# Altium PCB GPS_Rev2.2.PcbDoc
Units mil, origin at the board's own origin, x right, y up, seen from the top; angles counter-clockwise.
Board outline 1915 x 1130 mil, 2 copper layers (Top Layer, Bottom Layer); 43 components, 35 nets, 189 pads, 34 vias.
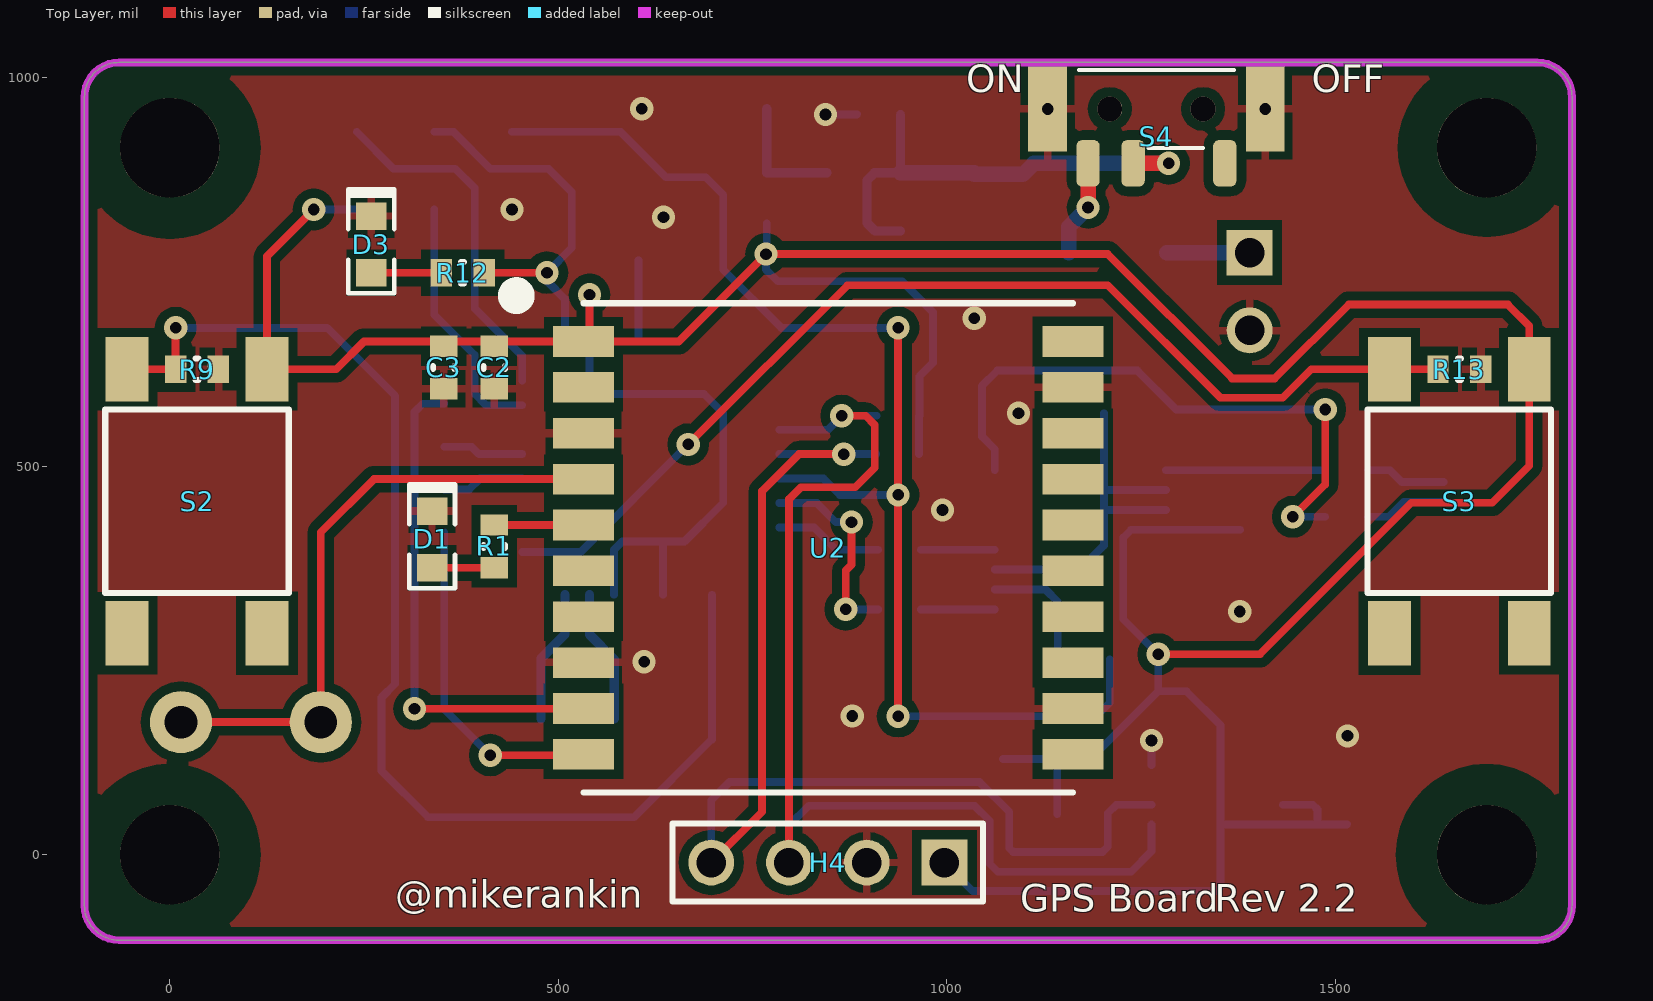
[diagram p0: Top Layer view]
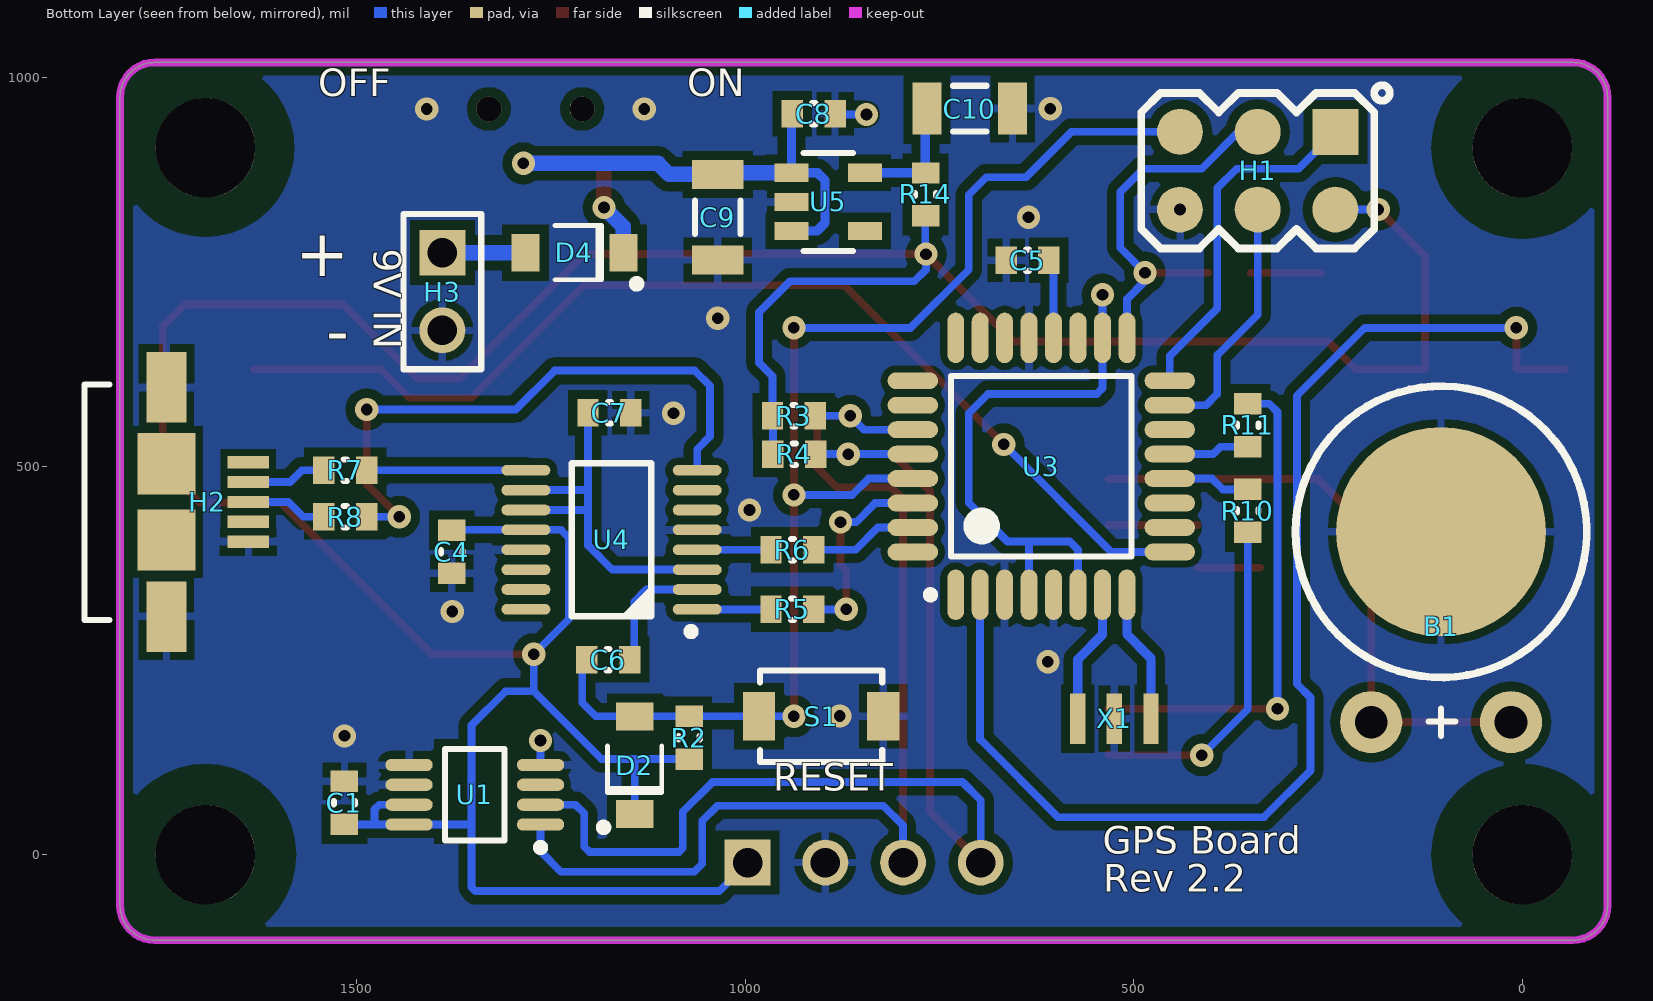
[diagram p1: Bottom Layer view, seen from below]
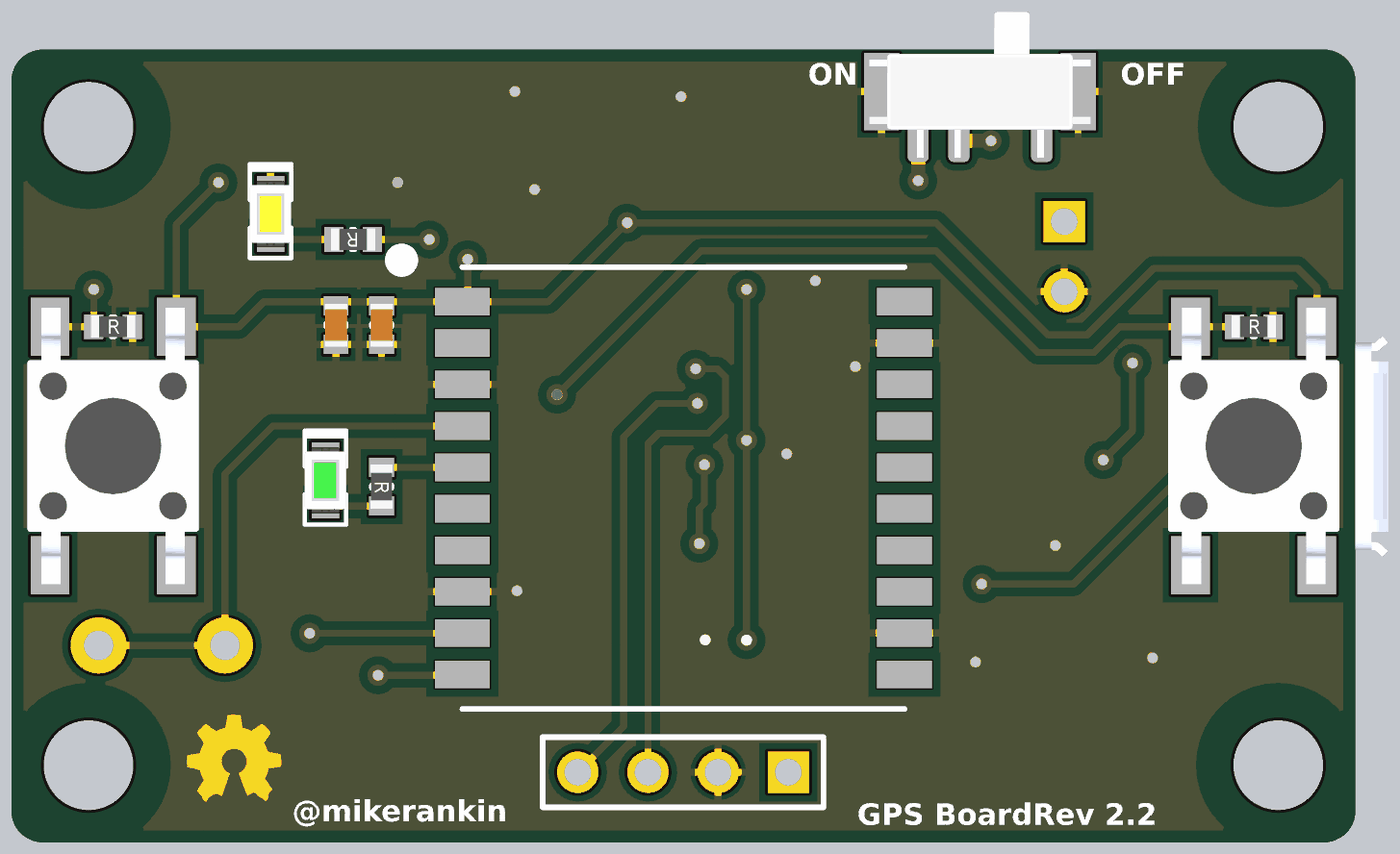
[diagram p2: 3D render of the assembled board from above, using the file's embedded part models]
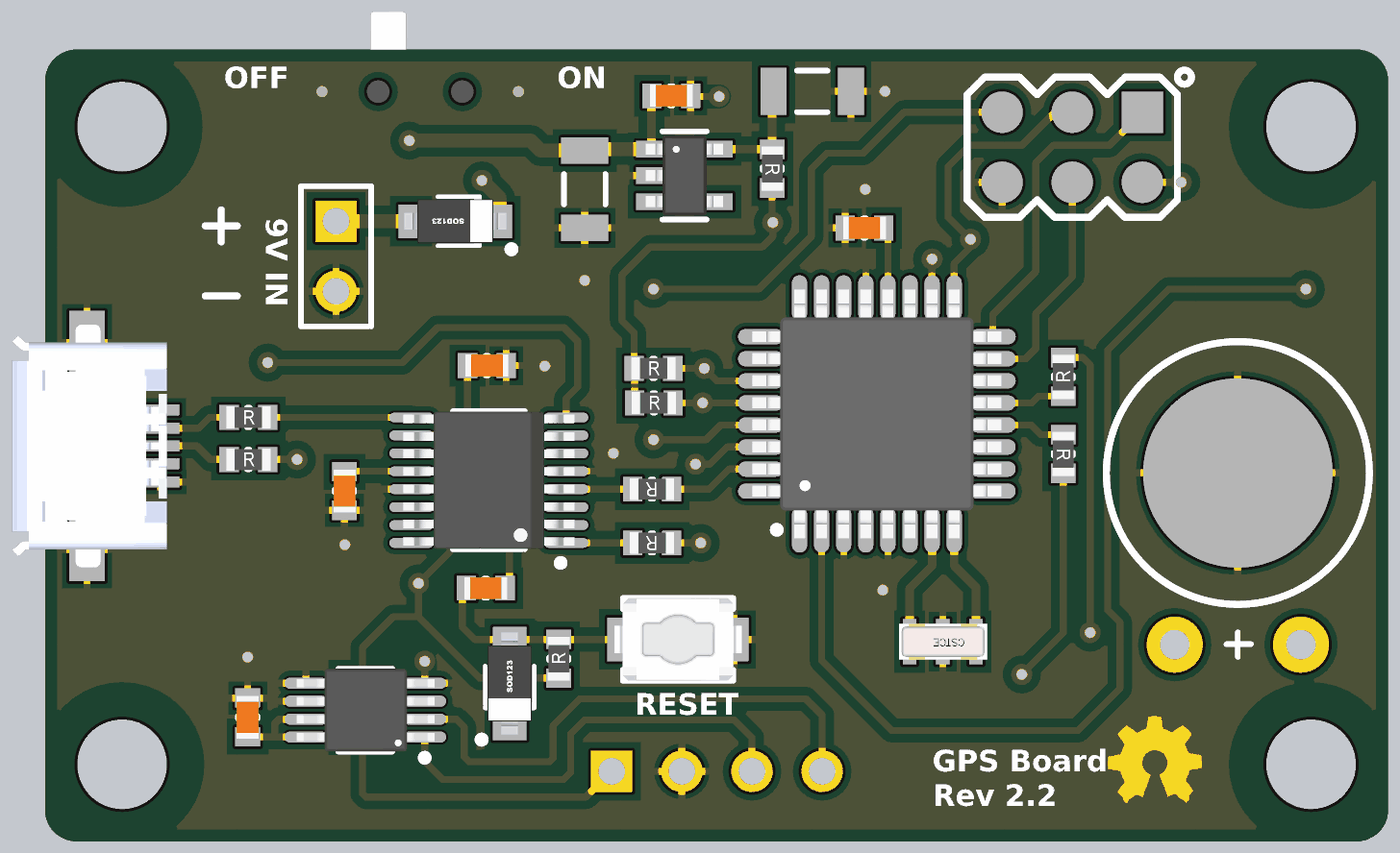
[diagram p3: 3D render of the assembled board from below, using the file's embedded part models]

## Layer stack, top to bottom
Top Solder: solder mask 0.4, Solder Resist, Dk 3.5
Top Layer: signal copper 1.4
Dielectric1: core 12.6, FR-4, Dk 4.8
Bottom Layer: signal copper 1.4
Bottom Solder: solder mask 0.4, Solder Resist, Dk 3.5

## Board outline
-110,-65 ccw(c-65,-65) -65,-110 1760,-110 ccw(c1760,-65) 1805,-65 1805,975 ccw(c1760,975) 1760,1020 -65,1020 ccw(c-65,975) -110,975

## Design rules (kind name [scope] priority, off if disabled: settings)
Clearance Clearance_USB [HasFootprint('1981584-1')] p1: gap=9.5
Clearance Clearance_SOP16 [HasFootprint('SOP65P602X173-16N')] p2: gap=9
Clearance TQFP [HasFootprint('TQFP80P700X700-32N')] p3: gap=9
Clearance MSOP [(HasFootprint('MSOP-8N - NOPAD'))] p4: gap=9
Clearance TSSOP_Footprint [HasFootprint('TSSOP50P490X110-10N')] p5: gap=7.5
Clearance [All] p6: gap=12
HoleSize [All] p1: absolutevalues=TRUE maxlimit=150 minlimit=1 maxpercent=80.000 minpercent=20.000
MinimumSolderMaskSliver MinimumSolderMaskSliver_1 [InComponent('U2')] p1: minsoldermaskwidth=1
MinimumSolderMaskSliver MinimumSolderMaskSliver_J1 [InComponent('J1')] p2: minsoldermaskwidth=3
MinimumSolderMaskSliver MinimumSolderMaskSliver_U6 [InComponent('U6')] p3: minsoldermaskwidth=2
MinimumSolderMaskSliver MinimumSolderMaskSliver_U1 [InComponent('U1')] p4: minsoldermaskwidth=2
MinimumSolderMaskSliver [All] p5: minsoldermaskwidth=5
PlaneConnect Via_No_Relief [(IsVia)] p1: planeconnectstyle=Direct reliefexpansion=20 reliefentries=4 reliefconductorwidth=10 reliefairgap=10
PlaneConnect [All] p2: planeconnectstyle=Relief reliefexpansion=20 reliefentries=4 reliefconductorwidth=30 reliefairgap=10
PolygonConnect No_Relief [(IsVia)] p1: connectstyle=Direct reliefconductorwidth=10 reliefentries=4 polygonreliefangle="90 Angle" airgapwidth=10
PolygonConnect [All] p2: connectstyle=Relief reliefconductorwidth=10 reliefentries=4 polygonreliefangle="90 Angle" airgapwidth=10
RoutingVias [All] p1: holewidth=0 width=30 viastyle="Through Hole" minholewidth=15 minwidth=30 maxholewidth=15 maxwidth=30
SilkToSilkClearance [All] p1: silktosilkclearance=4
SilkToSolderMaskClearance SilkscreenOverComponentPads [IsPad] p1: minsilkscreentomaskgap=2 clearancetoexposedcopper=TRUE
SolderMaskExpansion [All] p1: expansion=4
Width [All] p1: maxlimit=25 minlimit=10 preferedwidth=10
25 further rules are at their usual default settings.

## Components (designator, comment, footprint, x,y, rotation, side; value= is the part's Value field where it differs from the comment)
B1 "CR927" "CR927 Mount" 104.35,415.75 r90 bottom
C1 "0.1uF" CAPC1608X09L 1516,67 r90 bottom
C2 "0.01uF" CAPC1608X09L 417.54,627.28 r270 top
C3 "0.1uF" CAPC1608X09L 352.54,627.28 r270 top
C4 "2.2uF" CAPC1608X09L 1378,390 r270 bottom
C5 "0.1uF" CAPC1608X09L 636.72,765.35 r180 bottom
C6 "0.1uF" CAPC1608X09L 1176.57,251.34 r0 bottom
C7 "0.1uF" CAPC1608X09L 1175,569 r180 bottom
C8 "0.1uF" CAPC1608X09L 912,954 r180 bottom
C9 "CAP_1206" CAPC3216X160L 1035.5,820.67 r270 bottom
C10 "CAP_1206" CAPC3216X160L 711.17,960.35 r180 bottom
D1 "Green LED" LED1608X55N-GREEN 337.54,405.94 r270 top
D2 "1N4148" SOD123 1142.44,115.23 r90 bottom
D3 "LED_0603" LED1608X55N-YELLOW 259.35,785.75 r270 top
D4 "1N4148" SOD123 1220,775 r0 bottom
H1 "DNP" HDR3X2 340.47,880.59 r0 bottom
H2 "Micro USB" 1981584-1 1692.34,454.21 r270 bottom
H3 "TSW-102-07-L-S" HDR1X2 1390,725 r270 bottom
H4 "TSW-104-07-L-S" HDR1X4-Empty 847,-10 r180 top
R1 "470R" RESC1608X06L 417.54,396.97 r270 top
R2 "10K" RESC1608X06L 1072.44,150.67 r90 bottom
R3 "4.7K" RESC1608X06L 937.44,565 r180 bottom
R4 "4.7K" RESC1608X06L 936.91,515.75 r180 bottom
R5 "1K" RESC1608X06L 939.41,315.87 r0 bottom
R6 "1K" RESC1608X06L 939.41,392.64 r0 bottom
R7 "27R" RESC1608X06L 1515,495 r180 bottom
R8 "27R" RESC1608X06L 1515,435 r180 bottom
R9 "10K" RESC1608X06L 35,625 r0 top
R10 "330R" RESC1608X06L 353.25,442.8 r270 bottom
R11 "330R" RESC1608X06L 353.25,552.91 r90 bottom
R12 "470R" RESC1608X06L 376.91,749.33 r180 top
R13 "10K" RESC1608X06L 1660,625 r0 top
R14 "0R" RESC1608X06L 768,850 r270 bottom
S1 "PPushButton" TL1015AF160QG 902.44,178.23 r0 bottom
S2 "Tactile_Switch" FSM6JSMA 35,455 r0 top
S3 "Tactile_Switch" FSM6JSMA 1660,455 r0 top
S4 "" SLIDE_SWITCH_DX 1270,960 r180 top
U1 "TMP75AIDGKR" "MSOP-8N - NOPAD" 1348.25,77.26 r0 bottom
U2 "MTK3339" FGPMMOPA6H 847.5,395 r0 top
U3 "ATMEGA328P-AU" TQFP80P700X700-32N 619,500 r90 bottom
U4 "FT230XS-R" SOP65P602X173-16N 1172.2,405.43 r0 bottom
U5 "LP2985-33DBVR" SOT95P280X144-5N 893.25,840.35 r180 bottom
X1 "" CSTCE 525,175 r0 bottom

## Footprints (in the part's own frame and the unit in brackets; to place one, negate y for a bottom-side part, rotate by r counter-clockwise, add the part's x,y. Pads: shape width x height; smd on the part's side, far side on the other; paste and mask are expansions set on the pad)
1981584-1 [mm] "CONN RCPT MICRO USB TYPE AB"
  rect 0.4x1.35 smd: 1(-1.3,1.338) 2(-0.65,1.338) 3(0,1.338) 4(0.65,1.338) 5(1.3,1.338)
  rect 2.3x1.3 smd: ""(-3.75,-1.337) ""(3.75,-1.337)
  rect 2x1.9 smd: ""(-1.25,-1.337) ""(1.25,-1.337)
  silkscreen extent -3.84,-4.02 3.86,-3.21, body extent -4.4,-4.05 4.4,1.55, height 2.75
CAPC1608X09L [mm] "Chip Capacitor, 2-Leads, Body 1.6x0.8mm, IPC High Density (0603 dense)"
  rect 0.7x0.9 smd: 1(-0.7,0) 2(0.7,0)
  silkscreen extent -0.05,-0.35 0.05,0.35, body extent -0.89,-0.48 0.88,0.48, height 1.03
CAPC3216X160L [mm] "Chip Capacitor, 2-Leads, Body 3.2x1.6mm, IPC Least Density(C1206)"
  rect 0.95x1.7 smd: 1(-1.4,0) 2(1.4,0)
  silkscreen extent -0.55,-0.75 0.55,0.75, body extent -1.7,-0.9 1.7,0.9, height 1.9
"CR927 Mount" [mil] "CR927 Mount"
  round 80 hole 42: 1(-245,-90) 1(-245,90)
  round 270 smd: 2(0,0)
  silkscreen extent -262,-187 187,188
CSTCE [mm] "SMT Crystal 3-Leads, Body 3.2x1.3mm"
  rect 0.5x1.651 smd: 1(1.2,0) 2(0,0) 3(-1.2,0)
  body extent -1.61,-0.65 1.59,0.65, height 1.01
FGPMMOPA6H [mm] "Chip SMT GPS- FGPMMOPA6H"
  rect 2x1 smd mask+0.051: 1(-8,6.75) 2(-8,5.25) 3(-8,3.75) 4(-8,2.25) 5(-8,0.75) 6(-8,-0.75) 7(-8,-2.25) 8(-8,-3.75) 9(-8,-5.25) 10(-8,-6.75) 11(8,-6.75) 12(8,-5.25) 13(8,-3.75) 14(8,-2.25) 15(8,-0.75) 16(8,0.75) 17(8,2.25) 18(8,3.75) 19(8,5.25) 20(8,6.75)
  silkscreen extent -10.4,-8 8,8.45, body extent -8,-8 8,8, height 5.2
FSM6JSMA [mil] "SWITCH TACTILE SPST-NO 0.05A 12V"
  rect 55.12x82.68 smd: 1(90,170) 2(90,-170) 3(-90,170) 4(-90,-170)
  silkscreen extent -118,-118 118,118, body extent -118,-197 118,197, height 276
HDR1X2 [mm]
  rect 1.5x1.5 hole 0.965: 1(-1.27,0)
  round 1.5 hole 0.965: 2(1.27,0)
  silkscreen extent -2.54,-1.27 2.54,1.27
HDR1X4-Empty [mm]
  rect 1.5x1.5 hole 0.965: 1(-3.81,0)
  round 1.5 hole 0.965: 2(-1.27,0) 3(1.27,0) 4(3.81,0)
  silkscreen extent -5.08,-1.27 5.08,1.27
HDR3X2 [mm]
  rect 1.5x1.5 smd: 1(-2.54,-1.27)
  round 1.5 smd: 2(-2.54,1.27) 3(0,-1.27) 4(0,1.27) 5(2.54,-1.27) 6(2.54,1.27)
  silkscreen extent -4.32,-2.79 3.81,2.54
LED1608X55N-GREEN [mm] "Chip LED GREEN 2-Leads, Body 1.6x0.8mm, IPC Medium Density (0603 med)"
  rect 0.9x1 smd: 1(-0.925,0) 2(0.925,0)
  silkscreen extent -1.8,-0.75 1.6,0.75, body extent -1.2,-0.75 1.2,0.75, height 1.4
LED1608X55N-YELLOW [mm] "Chip LED YELLOW, 2-Leads, Body 1.6x0.8mm, IPC Medium Density (0603 med)"
  rect 0.9x1 smd: 1(-0.925,0) 2(0.925,0)
  silkscreen extent -1.8,-0.75 1.6,0.75, body extent -1.2,-0.75 1.2,0.75, height 1.4
"MSOP-8N - NOPAD" [mm]
  oval 1.55x0.4 smd mask+0.076: 1(-2.15,0.975) 2(-2.15,0.325) 3(-2.15,-0.325) 4(-2.15,-0.975) 5(2.15,-0.975) 6(2.15,-0.325) 7(2.15,0.325) 8(2.15,0.975)
  silkscreen extent -2.27,-1.5 0.97,1.85, body extent -2.51,-1.5 2.49,1.5, height 1.1
RESC1608X06L [mm] "Chip Resistor, 2-Leads, Body 1.6x0.8mm, IPC High Density (0603 dense)"
  rect 0.7x0.9 smd: 1(-0.7,0) 2(0.7,0)
  silkscreen extent -0.05,-0.35 0.05,0.35, body extent -0.85,-0.47 0.85,0.47, height 0.6
SLIDE_SWITCH_DX [mil] "Slide Switch DX"
  rrect50% 30x60 smd: 1(88,70) 2(30,70) 3(-88,70)
  rect 50x110 smd: 4(-140,0) 5(140,0)
  round 32 hole 32 unplated: ""(-60,0) ""(60,0)
  silkscreen extent -100,-50 100,50, body extent -157,-114 158,94, height 60
SOD123 [mil] "Molded Diode, 2-Leads, Body 2.85x1.8mm, IPC Medium Density (SOD123)"
  rect 36x48 smd: 1(-63,0) 2(63,0)
  silkscreen extent -85,-35 25,45, body extent -73,-31 73,32, height 50
SOP65P602X173-16N [mm] "SOP, 16-Leads, Body 5.0x4.0mm (max), Pitch 0.65mm, IPC Medium Density"
  oval 1.6x0.35 smd mask+0.076: 1(-2.8,2.275) 2(-2.8,1.625) 3(-2.8,0.975) 4(-2.8,0.325) 5(-2.8,-0.325) 6(-2.8,-0.975) 7(-2.8,-1.625) 8(-2.8,-2.275) 9(2.8,-2.275) 10(2.8,-1.625) 11(2.8,-0.975) 12(2.8,-0.325) 13(2.8,0.325) 14(2.8,0.975) 15(2.8,1.625) 16(2.8,2.275)
  silkscreen extent -2.72,-2.5 1.3,3.12, body extent -3.1,-2.49 3.1,2.49, height 1.78
SOT95P280X144-5N [mm] "SOT23, 5-Leads, Body 3.1x3.0mm (max), Pitch 0.95mm, IPC Medium Density (RFMD SOT23-5)"
  rect 1.1x0.6 smd: 1(-1.2,0.95) 2(-1.2,0) 3(-1.2,-0.95) 4(1.2,-0.95) 5(1.2,0.95)
  silkscreen extent -0.8,-1.6 0.8,1.6, body extent -1.4,-1.45 1.4,1.45, height 1.45
TL1015AF160QG [mm] "SWITCH TACTILE SPST-NO 0.05A 12V"
  rect 1.05x1.59 smd: 1(-2.032,0) 2(2.032,0)
  silkscreen extent -2,-1.5 2,1.5, body extent -2.3,-1.5 2.3,1.5, height 2
TQFP80P700X700-32N [mm] "TQFP 0.80mm pitch 32 pins"
  oval 1.65x0.55 smd: 1(-4.2,2.8) 2(-4.2,2) 3(-4.2,1.2) 4(-4.2,0.4) 5(-4.2,-0.4) 6(-4.2,-1.2) 7(-4.2,-2) 8(-4.2,-2.8) 17(4.2,-2.8) 18(4.2,-2) 19(4.2,-1.2) 20(4.2,-0.4) 21(4.2,0.4) 22(4.2,1.2) 23(4.2,2) 24(4.2,2.8)
  oval 0.55x1.65 smd: 9(-2.8,-4.2) 10(-2,-4.2) 11(-1.2,-4.2) 12(-0.4,-4.2) 13(0.4,-4.2) 14(1.2,-4.2) 15(2,-4.2) 16(2.8,-4.2) 25(2.8,4.2) 26(2,4.2) 27(1.2,4.2) 28(0.4,4.2) 29(-0.4,4.2) 30(-1.2,4.2) 31(-2,4.2) 32(-2.8,4.2)
  silkscreen extent -4.32,-2.95 2.95,3.75, body extent -4.51,-4.51 4.51,4.51, height 1.13

## Part data
B1: "Custom CR927 mount"
C1: library part CAP_0603, "CAP 0603"
C2: library part CAP_0603, "CAP CER 0.01uF, 0603"
C3 C5 C6 C7 C8: library part CAP_0603, "CAP CER 0.1uF, 0603"
C4: library part CAP_0805, "2.2uF, 0602"
C9 C10: "CAP CER 4.7uF, 1206"
D1: library part LED_0603, "LED_0603"
D2 D4: library part 1N4148W-TP, "DIODE SWITCH 100V 0.15A SOD123"
H1: library part CON3X2, "CONN HEADER 3X2POS .100\" PADS"
H2: library part 1981584-1, "CONN RCPT MICRO USB TYPE AB"
H3: "CONN HEADER 2POS .100\" SGL GOLD"
H4: "CONN HEADER 4POS .100\" SGL GOLD"
R1 R2 R3 R4 R5 R6 R7 R8 R9 R10 R11 R12 R13 R14: library part RES_0603, "RES 0603"
S1: library part DX_MINI_TACT_SWITCH, "DX_SWITCH TACTILE"
S2 S3: library part FSM6JSMA, "SWITCH TACTILE SPST-NO 0.05A 12V"
S4: library part DX_SLIDE_SWITCH, "DX_SWITCH SLIDE SPDT R/A"
U1: "IC DGTL TEMP SENSOR 2WIRE 8-MSOP"
U2: "GPS Chip - FGPMMOPA6H"
U3: "MCU AVR 32K FLASH 32TQFP"
U4: "IC USB SERIAL BASIC UART 16SSOP"
U5: "IC REG LDO 3.3V .15A SOT23-5"
X1: library part CSTCE8M00G55-R0, "CER RESONATOR 8.0MHZ SMD"

## Free pads (board coordinates)
  round 128 hole 128 unplated: ""(0,0) ""(0,910) ""(1695,0) ""(1695,910)
  round 210 on Keep-Out: ""(0,0) ""(0,910) ""(1695,0)
  round 205 on Keep-Out: ""(1695,910)

## Via types
v1: diameter 30, hole 15, Top Layer to Bottom Layer, tented both sides, 34 vias

## Nets (pads, with @x,y where several pads share a name; then routed paths per layer and width w, separated by ;. In a path a pad name is that pad's centre, name@x,y a point inside that pad or via, vN(x,y) a via of type N, cw(c..) or ccw(c..) an arc to the next point about the centre after c; other vN are vias at no path point)
GND: B1.2 C1.2 C2.2 C3.2 C4.2 C5.1 C7.2 C8.2 C9.2 C10.2 D1.1 D3.1 H1.6 H2.5 H2.@1745,306.57 H2.@1745,601.85 H3.2 H4.2 R9.2 R13.2 S1.1 S4.4 S4.5 U1.4 U1.5 U1.6 U2.3 U2.8 U2.12 U2.19 U3.3 U3.5 U3.21 U4.5 U4.13 U5.2 X1.2 | length 72
  Bottom Layer w10: v1(844,953) 884.21,953 C8.2@884.44,953.23 ; U1.4 v1(1263.61,147.06)
  other v1: 1516,153 878.57,178.58 610.5,248.58 1377.44,313.23 994.57,443.82 1092.44,568.23 1035.5,690.51 635.5,820.51 440.47,830.59 607.44,960.35 1130,960 1410,960
NetB1_1: B1.1 U2.4 | length 790.9
  Top Layer w10: B1.1@14.35,170.75 194.35,170.75 194.35,415.14 262.8,483.58 U2.4
NetC5_2: C5.2 U3.20 | length 100
  Bottom Layer w10: U3.20 C5.2@603.25,765.35
NetC6_1: C6.1 U4.2 | length 162
  Bottom Layer w10: U4.2 1127.23,341.46 1143.11,325.57 C6.1@1143.11,251.34
NetC6_2: C6.2 D2.2 H1.5 R2.2 S1.2 U3.29 | length 1655.1
  Top Layer w10: v1(937.44,178.23) v1(937.44,463.23) v1(937.44,678.23)
  Bottom Layer w10: H1.5 580.08,930.59 638.67,872 690,872 712.44,849.56 712.44,753.23 787.44,678.23 v1(937.44,678.23) ; U3.29 841.42,484.25 862.44,463.23 v1(937.44,463.23) ; v1(937.44,178.23) S1.2 R2.2 D2.2 1192.44,178.23 1210.04,195.83 C6.2@1210.04,251.34
NetC7_1: C7.1 U4.3 U4.10 U4.11 | length 479
  Bottom Layer w10: U4.3 1171.26,367.05 1202.44,398.23 C7.1@1202.44,568.23 ; 1203.03,443.82 U4.11 ; 1206.26,469.41 U4.10
NetC8_1: C8.1 C9.1 S4.2 U5.1 U5.3 | length 621
  Top Layer w20: S4.2 v1(1285.67,890)
  Bottom Layer w12: U5.3 907.72,802.95 897.44,813.23 897.44,868.23 906.97,877.76 U5.1 C8.1@940.5,952.76
  Bottom Layer w20: U5.1 C9.1@1035.5,877.76 ; C9.1 1098.03,875.79 1112.24,890 v1(1285.67,890)
NetC10_1: C10.1 R14.1 U5.5 | length 160.3
  Bottom Layer w10: R14.1@768.25,877.83 R14.1@768.33,877.76
  Bottom Layer w12: R14.1@768.25,877.83 C10.1@768.25,960.35 ; R14.1@768.33,877.76 U5.5
NetD1_2: D1.2 R1.2 | length 80
  Top Layer w10: D1.2 337.66,369.41 R1.2
NetD3_2: D3.2 R12.2 | length 90
  Top Layer w10: D3.2 R12.2
NetD4_1: D4.1 S4.1 | length 125.4
  Top Layer w20: v1(1182,833.23) S4.1
  Bottom Layer w20: D4.1 1157,808.23 v1(1182,833.23)
NetD4_2: D4.2 H3.1 | length 107
  Bottom Layer w20: D4.2 H3.1
NetH1_1: H1.1 U3.16 | length 455.3
  Bottom Layer w10: H1.1 287.83,883.23 367.44,883.23 392.44,858.23 392.44,703.23 453.65,642.02 U3.16
NetH1_3: H1.3 R12.1 U3.17 | length 500.8
  Top Layer w10: R12.1 v1(485.5,749.33)
  Bottom Layer w10: H1.3 365.08,930.59 412.44,883.23 487.44,883.23 517.44,853.23 517.44,781.28 v1(485.5,749.33) 485.5,738.58 508.76,715.32 U3.17
NetH1_4: H1.4 U3.15 | length 326.1
  Bottom Layer w10: H1.4 340.47,695.2 392.44,643.23 392.44,593.23 406.93,578.74 U3.15
NetH2_2: H2.2 R7.1 | length 103.4
  Bottom Layer w10: R7.1 1570.67,495 1585.87,479.8 H2.2
NetH2_3: H2.3 R8.1 | length 105.1
  Bottom Layer w10: R8.1 1569.21,435 1588.43,454.21 H2.3
NetH4_3: H4.3 R3.2 U1.1 U3.27 | length 1467.8
  Top Layer w10: H4.3 797,457.79 812.44,473.23 882.44,473.23 907.44,498.23 907.44,553.23 895.67,565 v1(865.02,565)
  Bottom Layer w10: U3.27 847.27,547.24 v1(865.02,565) R3.2 ; H4.3 797,37.79 822.44,63.23 1035.85,63.23 1055.5,43.58 1055.5,-11.42 1065.85,-21.77 1237.44,-21.77 1263.61,4.39 U1.1
NetH4_4: H4.4 R4.2 U1.2 U3.28 | length 1526.2
  Top Layer w10: H4.4 762.44,55.44 762.44,468.23 809.96,515.75 v1(867.44,515.75)
  Bottom Layer w10: H4.4 697,70.09 720.5,93.58 1042.09,93.58 1080.5,55.17 1080.5,8.58 1085.5,3.58 1200.5,3.58 1207.44,10.53 1207.44,53.23 1218.68,64.46 U1.2 ; U3.28 v1(867.44,515.75) R4.2
NetR1_1: R1.1 U2.5 | length 115
  Top Layer w10: R1.1 U2.5
NetR5_1: R5.1 U3.30 | length 260.4
  Top Layer w10: v1(870.08,315.87) 870.08,365.87 877.44,373.23 v1(877.44,428.23)
  Bottom Layer w10: U3.30 832.91,452.76 857.44,428.23 v1(877.44,428.23) ; v1(870.08,315.87) R5.1
NetR5_2: R5.2 U4.1 | length 95
  Bottom Layer w10: R5.2 U4.1
NetR6_1: R6.1 U3.31 | length 139.4
  Bottom Layer w10: U3.31 829.41,421.26 858.03,392.64 R6.1
NetR6_2: R6.2 U4.4 | length 95
  Bottom Layer w10: R6.2 U4.4
NetR7_2: R7.2 U4.9 | length 205
  Bottom Layer w10: U4.9 R7.2
NetR8_2: R8.2 U4.8 | length 783.5
  Top Layer w10: v1(1445.67,435) 1487.44,476.77 v1(1487.44,573.23)
  Bottom Layer w10: U4.8 1061.97,522.11 1045.5,538.58 1045.5,603.58 1065.14,623.23 1245.5,623.23 1295.5,573.23 v1(1487.44,573.23) ; v1(1445.67,435) R8.2
NetR9_1: R9.1 S2.3 U3.2 | length 1602
  Top Layer w10: S2.3 R9.1 v1(7.44,678.23)
  Bottom Layer w10: v1(7.44,678.23) 202.44,678.23 290,590.67 290,220 272.44,202.44 272.44,108.23 332.44,48.23 597.44,48.23 697.74,148.53 U3.2
NetR10_1: R10.1 U3.12 | length 106.2
  Bottom Layer w10: R10.1 385.38,470.35 399.28,484.25 U3.12
NetR10_2: R10.2 U2.10 | length 432
  Top Layer w10: v1(412.44,128.23) 531.52,128.23 U2.10
  Bottom Layer w10: R10.2 353.25,187.42 v1(412.44,128.23)
NetR11_1: R11.1 U3.13 | length 104.4
  Bottom Layer w10: R11.1 388.33,525.35 397.94,515.75 U3.13
NetR11_2: R11.2 U2.9 | length 642.3
  Top Layer w10: v1(315,188) 532.23,188 U2.9
  Bottom Layer w10: v1(315,188) 315,570 325.47,580.47 R11.2
NetR13_1: R13.1 S3.3 U3.9 | length 1396.4
  Top Layer w10: v1(667.44,528.23) 872.44,733.23 1207.44,733.23 1352.44,588.23 1432.44,588.23 1469.21,625 S3.3 R13.1
  Bottom Layer w10: U3.9 528.98,389.76 v1(667.44,528.23)
NetU3_7: U3.7 X1.1 | length 172.9
  Bottom Layer w12: U3.7 540.26,283.43 572.24,251.44 X1.1
NetU3_8: U3.8 X1.3 | length 172.5
  Bottom Layer w12: X1.3 477.76,252.73 508.76,283.74 U3.8
VCC: C1.1 C2.1 C3.1 C4.1 D2.1 H1.2 H4.1 R2.1 R3.1 R4.1 R14.2 S2.1 S3.1 U1.7 U1.8 U2.1 U3.4 U3.6 U3.18 U4.12 | length 5698.3
  Top Layer w10: v1(185.08,830.59) 125,770.51 S2.1 214.21,625 249.96,660.75 U2.1 ; v1(540.26,721.05) 540.26,668.47 U2.1 ; v1(1272.44,258.23) 1403.23,258.23 1598.23,453.23 1702.44,453.23 1750,500.79 S3.1 1750,680.67 1722.44,708.23 1517.44,708.23 1422.44,613.23 1367.44,613.23 1207.44,773.23 v1(767.44,773.23) 654.96,660.75 U2.1
  Bottom Layer w10: v1(185.08,830.59) H1.2 ; v1(540.26,721.05) U3.18 540.26,600.41 547.44,593.23 687.44,593.23 712.44,568.23 712.44,453.23 662.44,403.23 634.75,403.23 ; U3.6 571.76,392.54 582.44,403.23 634.75,403.23 ; U3.4 634.75,403.23 ; v1(767.44,773.23) 767.44,753.23 782.44,738.23 942.44,738.23 982.44,698.23 982.44,633.23 965,615.79 R3.1 964.47,564.47 R4.1 ; v1@768.25,772.42 R14.2@768.25,812.87 ; H4.1 1033.77,-46.77 1347.44,-46.77 1352.44,-41.77 1352.44,166.64 1308.55,210.53 1272.44,210.53 ; R2.1 1142.44,123.11 ; D2.1 1142.44,123.11 ; 1353.09,38.87 U1.8 1477.44,38.87 ; C4.1@1377.44,418.23 U4.12 1237.44,418.23 1227.44,408.23 1227.44,303.23 v1(1272.44,258.23) 1272.44,210.53 ; U1.7 1471.2,64.46 1477.44,58.23 1477.44,38.87 ; C1.1@1515.5,39.29 1515.08,38.87 1477.44,38.87 ; 1142.44,123.11 1185.02,123.11 1272.44,210.53
pads on no net: H2.1 H2.4 H2.@1745,405 H2.@1745,503.43 S2.2 S2.4 S3.2 S3.4 S4. S4.3 U1.3 U2.2 U2.6 U2.7 U2.11 U2.13 U2.14 U2.15 U2.16 U2.17 U2.18 U2.20 U3.1 U3.10 U3.11 U3.14 U3.19 U3.22 U3.23 U3.24 U3.25 U3.26 U3.32 U4.6 U4.7 U4.14 U4.15 U4.16 U5.4

## Polygon pours and split planes (outlines as drawn)
GND on Bottom Layer "Bottom-GND" (solid, remove dead copper, pour order 4): -115,1025 1810,1025 1810,-110 1805,-115 -110,-115 -110,1020 -120,1030
GND on Top Layer "Top-GND" (solid, pour order 2): -110,1030 -105.03,1025.02 1805.19,1025.02 1805.19,-100.02 1800.22,-105 -105.03,-105 -105.03,1030

## Keep-outs
Keep-Out Layer:
  lines w10: 595,-110 1760,-110 ccw(c1760,-65) 1805,-65 1805,975 ccw(c1760,975) 1760,1020 -65,1020 ccw(c-65,975) -110,975 -110,-65 ccw(c-65,-65) -65,-110 565,-110 600,-110

## Other copper
Bottom Layer:
  pour cut-out: 1400.64,149.64 1401.25,149.03 1401.25,13.26 1297.25,13.26 1297.25,149.26 1400.25,149.26

## Silkscreen, mask and mechanical layers (free items; w line width, h text height)
Top Overlay:
  text "@mikerankin" at 290,-80 h60
  text "GPS Board" at 1095,-85 h60
  text "Rev 2.2" at 1345,-85 h60
Bottom Overlay:
  text "ON" at 1075,965 h60
  text "OFF" at 1550,965 h60
  text "9V IN" at 1490,780 h60 r90
  text "+" at 1510,745 h60
  text "-" at 1510,645 h60
  text "RESET" at 964.35,70.75 h60
  text "GPS Board" at 540,-10 h60
  text "Rev 2.2" at 539.35,-59.25 h60
Top Solder:
  region: 697 vertices and 0 holes, not listed, extent 140.05,-52.2 274.64,72.21
Bottom Solder:
  region: 697 vertices and 0 holes, not listed, extent 155.44,-55.46 290.03,68.94
Board_Outline:
  lines w10: -110,-65 ccw(c-65,-65) -65,-110 435,-110 1760,-110 ccw(c1760,-65) 1805,-65 1805,975 ccw(c1760,975) 1760,1020 -65,1020 ccw(c-65,975) -110,975 -110,-65
Bottom Assembly:
  lines w2: 646,925 776,925 776,995 646,995 646,925 ; 1000,760 1070,760 1070,890 1000,890 1000,760

## Text inside footprints (layer, text, board x,y; h text height)
S4: Top Overlay "ON" at 1025,970 h60; Top Overlay "OFF" at 1470,970 h60